# Altium PCB small_matrix_ws2812_LEDs.PcbDoc (part 1 of 2)
Units mm, origin at the board's own origin, x right, y up, seen from the top; angles counter-clockwise.
Board outline 51.05 x 59.31 mm, 2 copper layers (Top Layer, Bottom Layer); 129 components, 63 nets, 389 pads, 120 vias.
Unrouted connection lines stored in the file: 10.
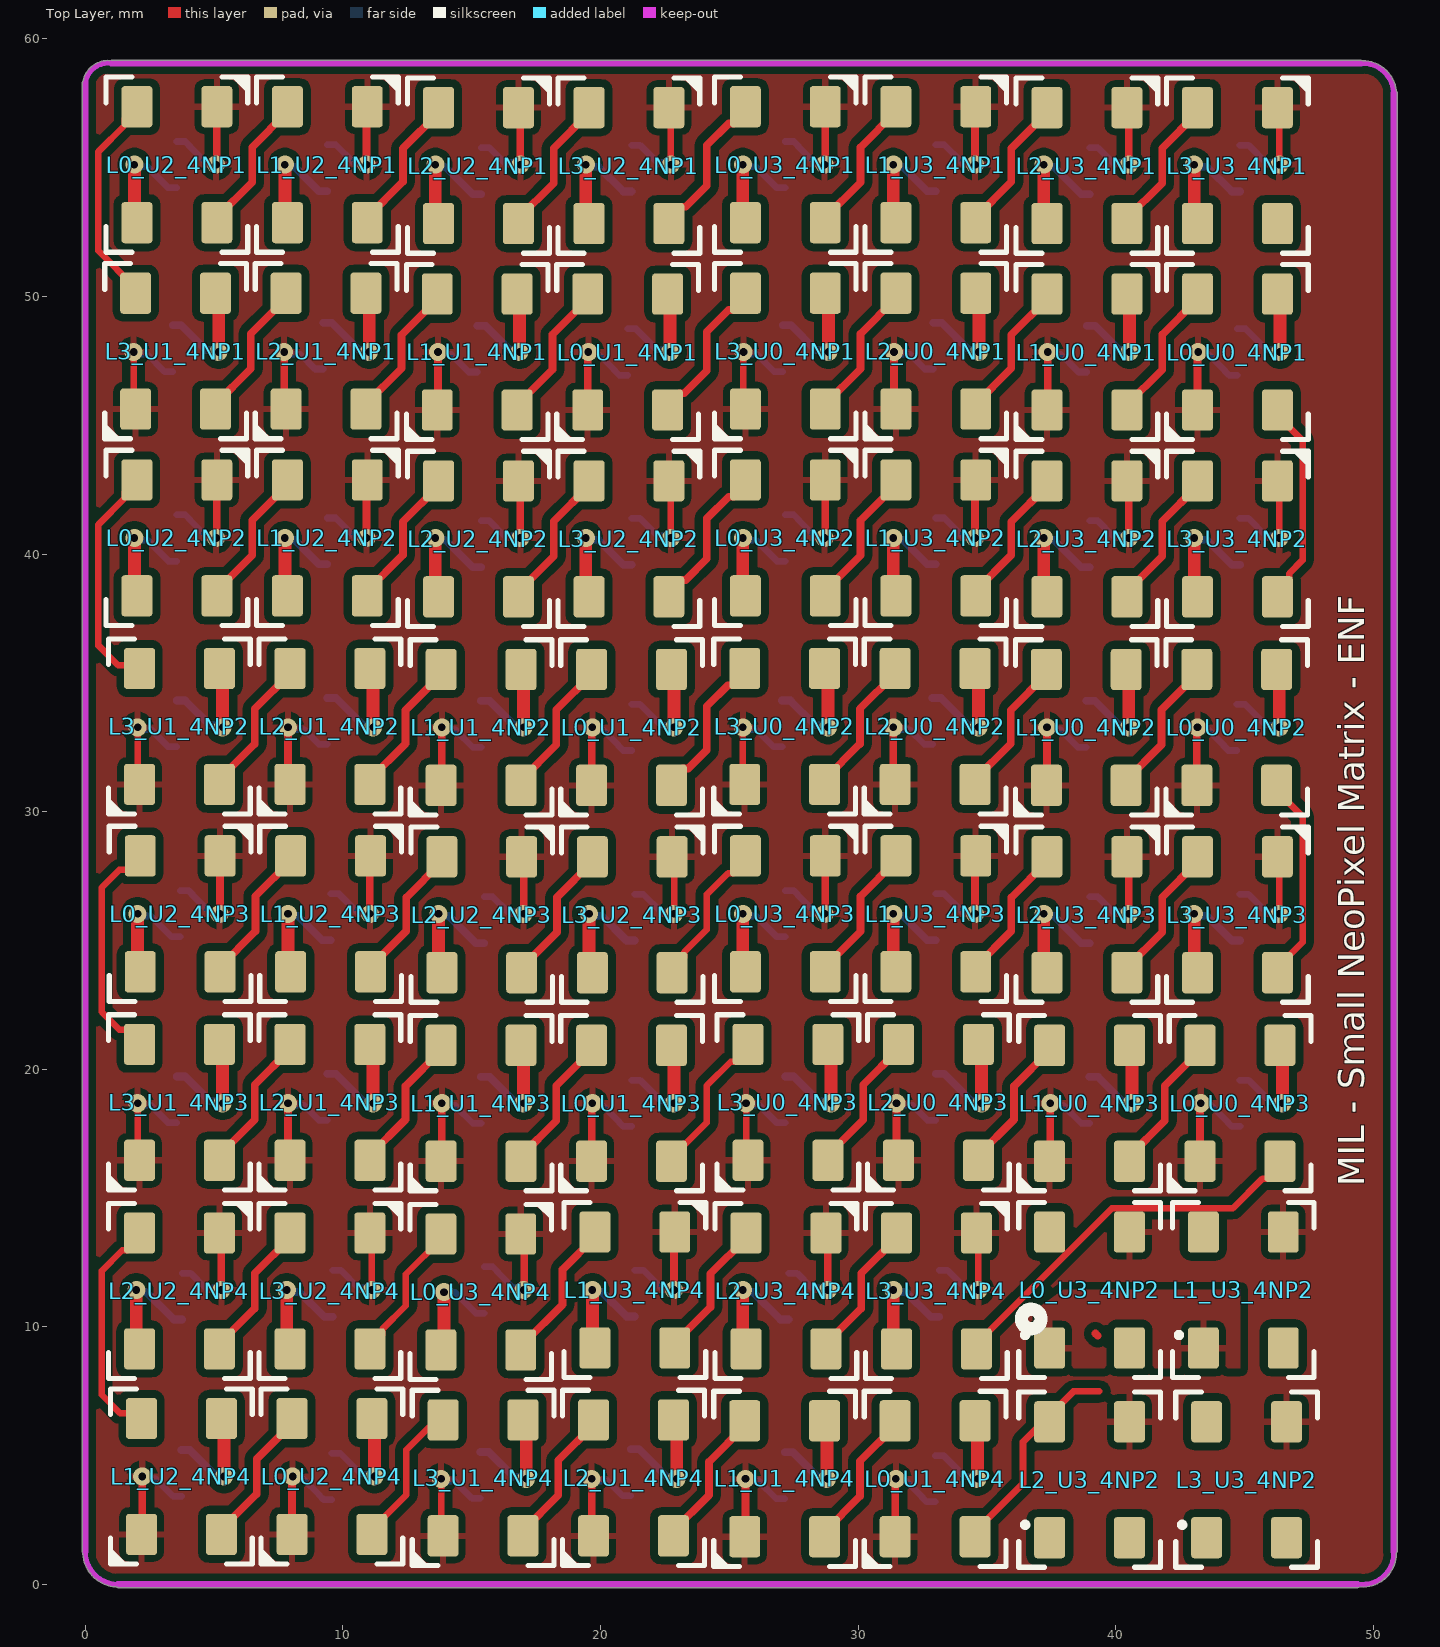
[diagram p0: Top Layer view]
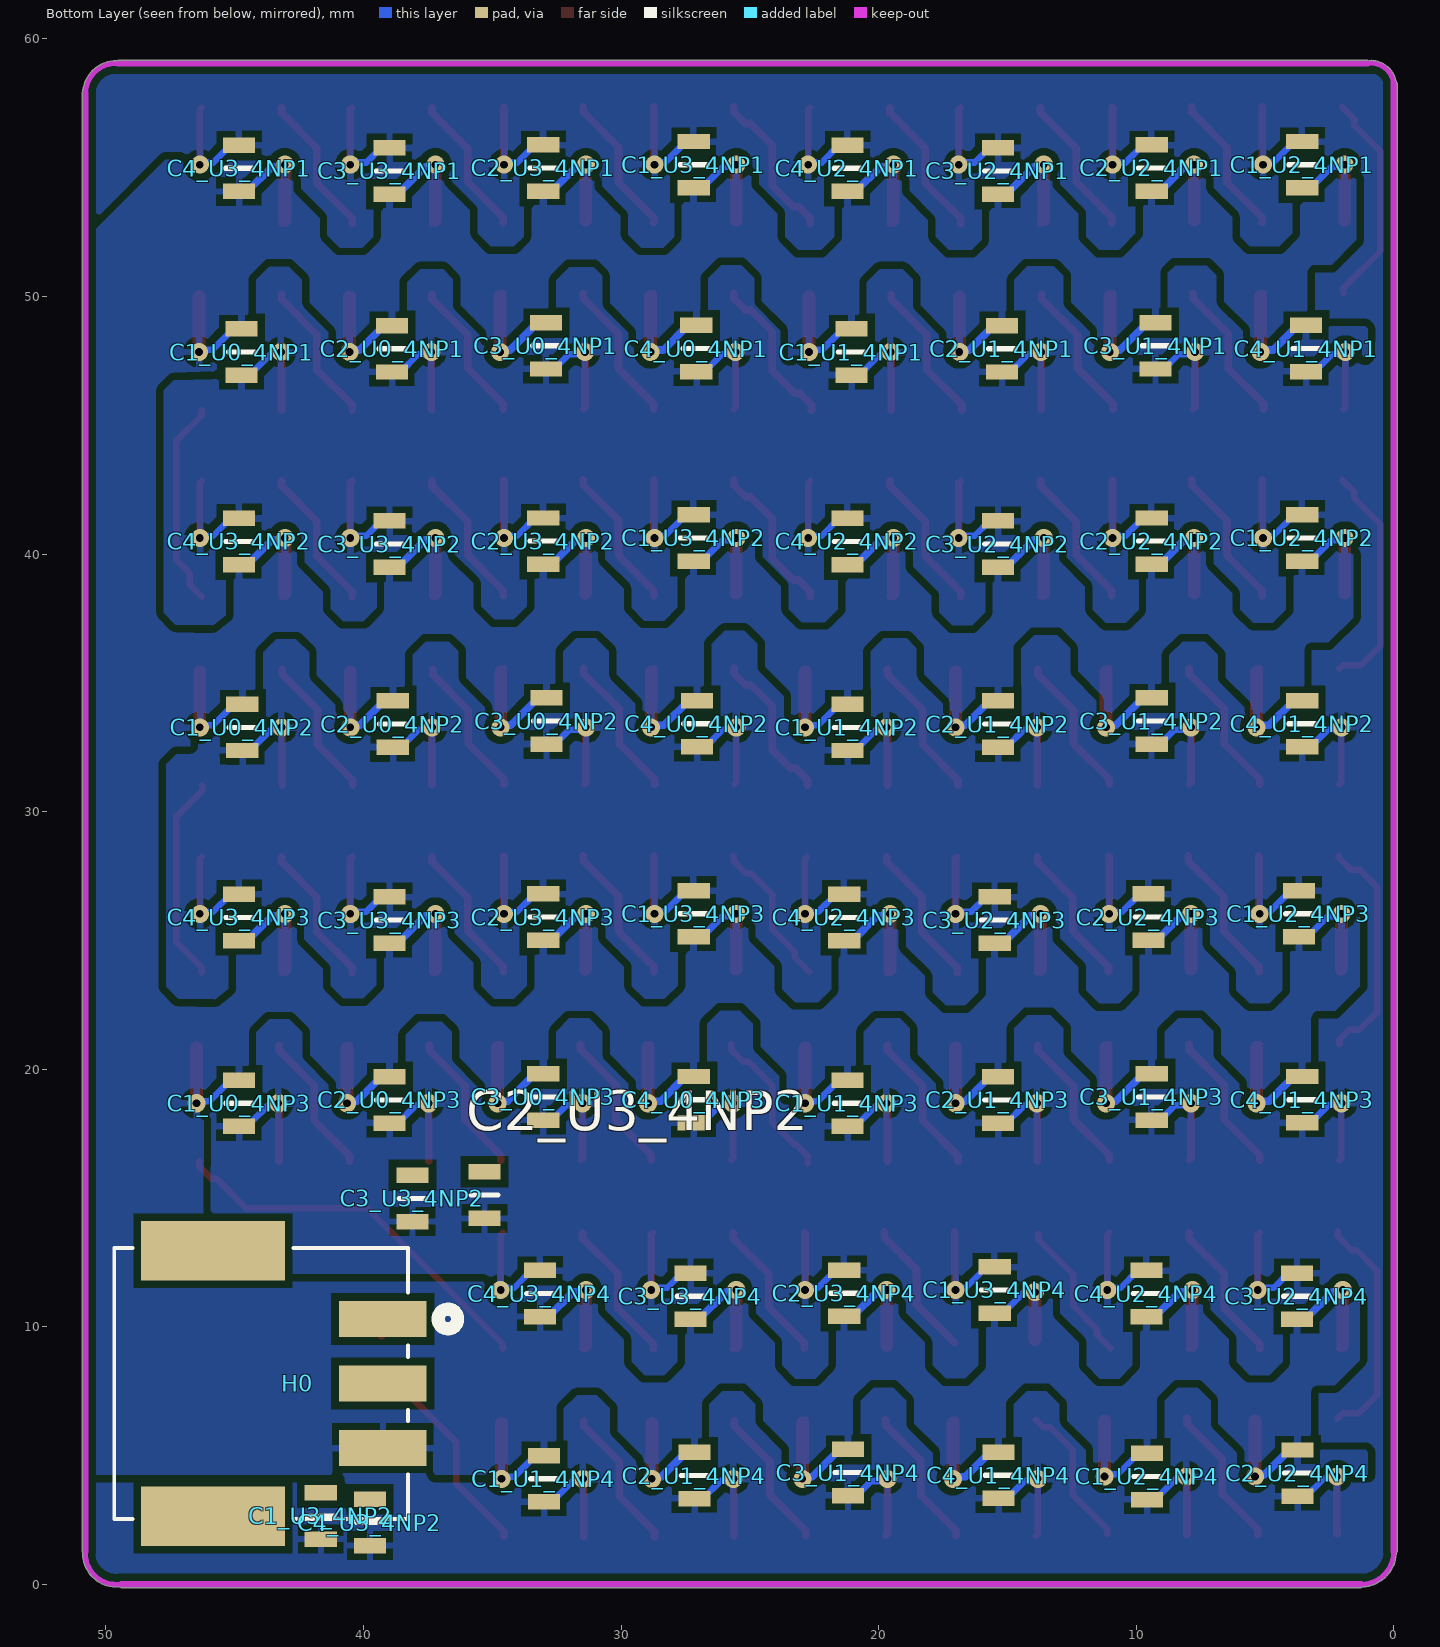
[diagram p1: Bottom Layer view, seen from below]
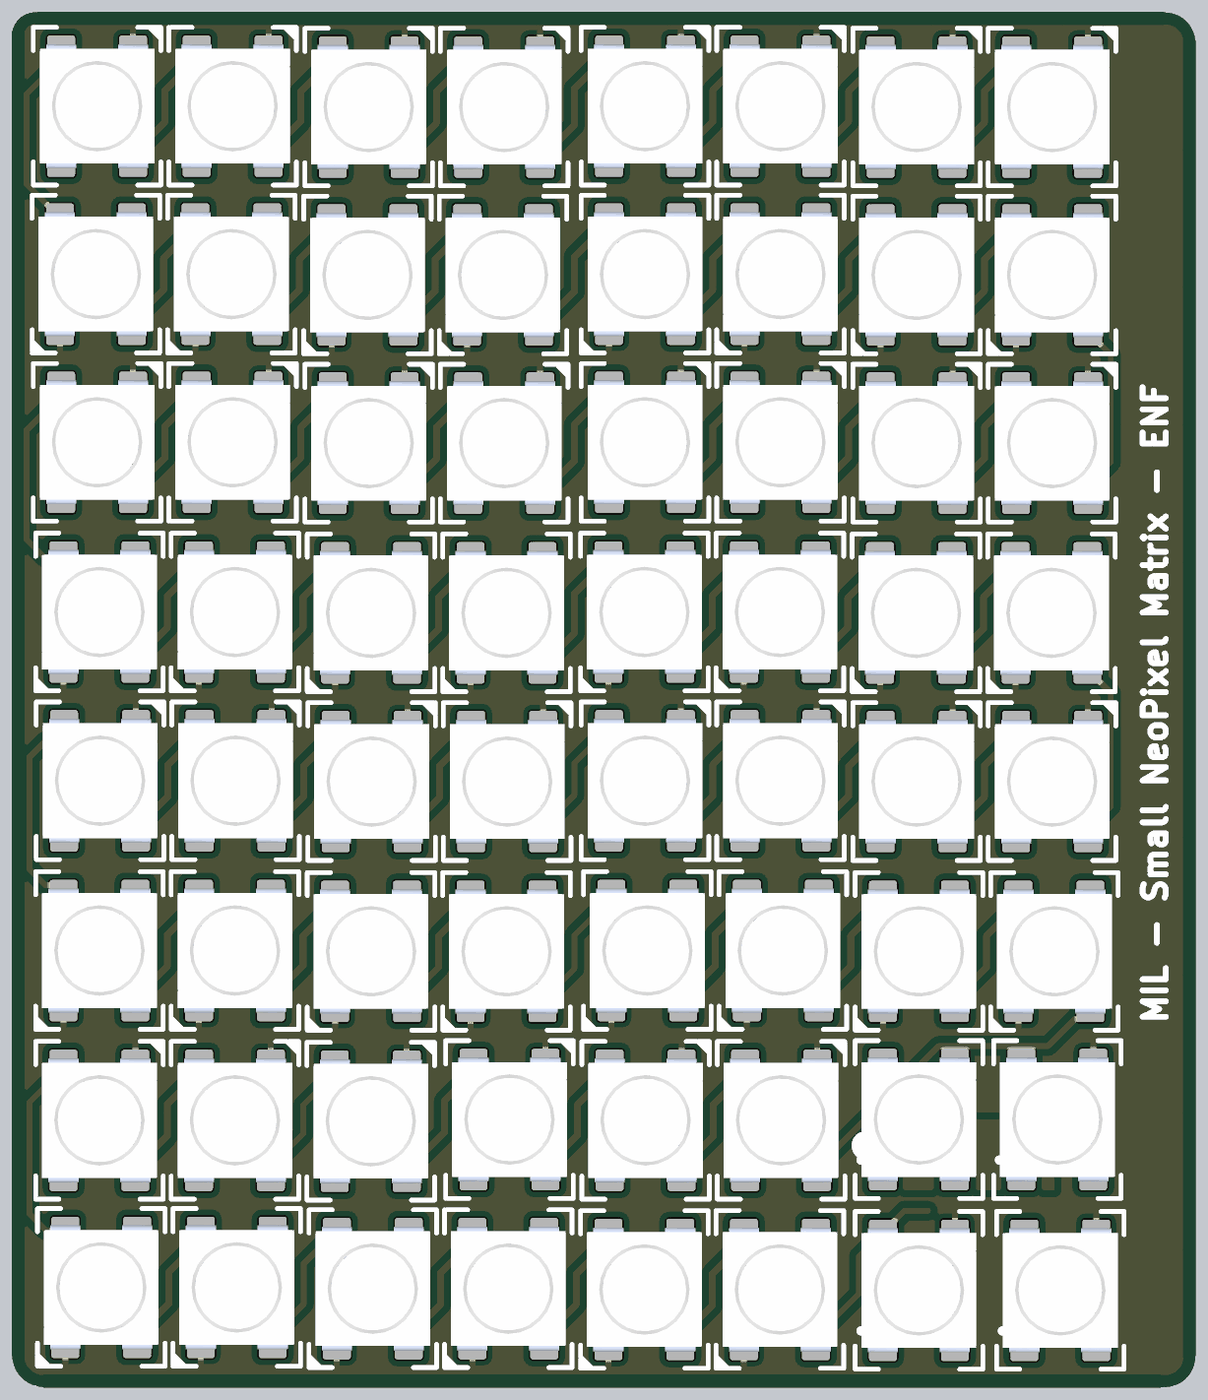
[diagram p3: 3D render of the assembled board from above, using the file's embedded part models]
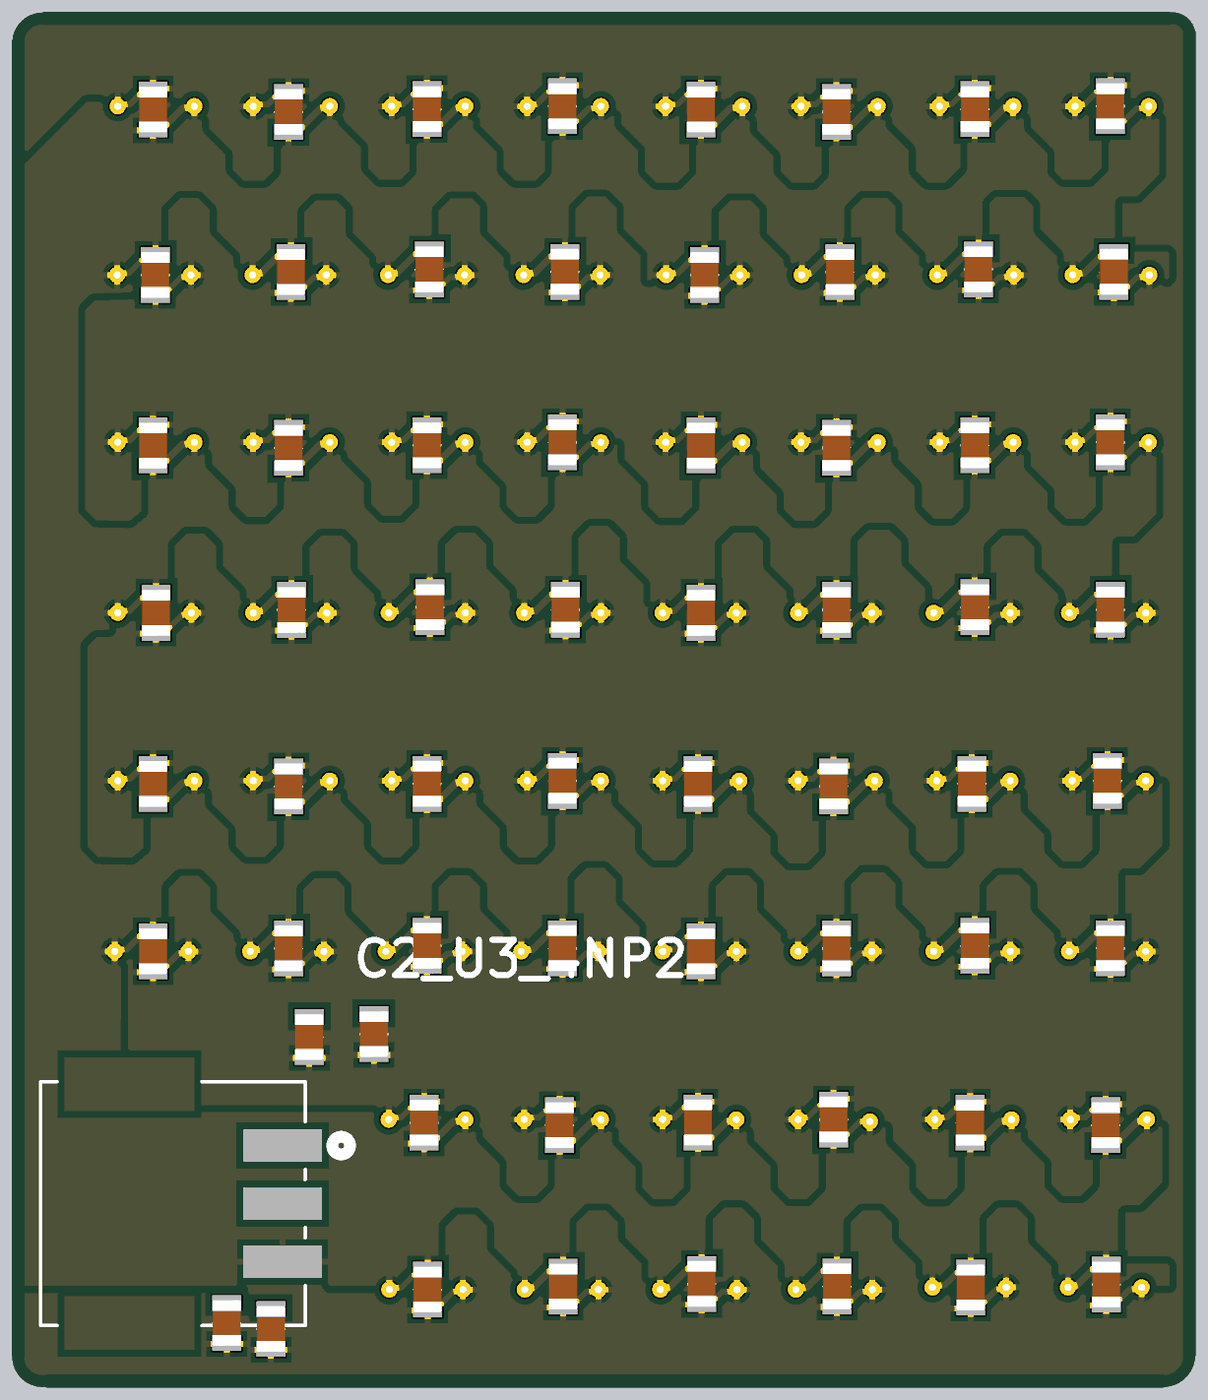
[diagram p4: 3D render of the assembled board from below, using the file's embedded part models]

## Layer stack, top to bottom
Top Solder: solder mask 0.0102, Solder Resist, Dk 3.5
Top Layer: signal copper 0.0356
Dielectric 1: dielectric 0.32, FR-4, Dk 4.8
Bottom Layer: signal copper 0.0356
Bottom Solder: solder mask 0.0102, Solder Resist, Dk 3.5

## Board outline
-0.127,1.27 -0.127,58.293 -0.084,58.388 cw(c0.889,58.166) 0.948,59.163 1.016,59.182 49.53,59.182 49.606,59.157 cw(c49.593,57.848) 50.893,57.999 50.927,57.912 50.927,1.27 50.902,1.194 cw(c49.593,1.206) 49.525,-0.1 49.403,-0.127 1.27,-0.127 1.189,-0.098 cw(c1.27,1.27)

## Design rules (kind name [scope] priority, off if disabled: settings)
BoardOutlineClearance [All] p1: gap=0.2 ignorepadtopadclearanceinfootprint=FALSE
Clearance "inPolygon Clearance" [InPolygon] p1: gap=0.3 ignorepadtopadclearanceinfootprint=TRUE // this rule ensures that every net within a polygon of a different net has a set clearance from the poly
Clearance "Different Diff Pair" [All] p2: gap=0.2 ignorepadtopadclearanceinfootprint=TRUE
Clearance "Same Diff Pair" [All] p3: gap=0.1 ignorepadtopadclearanceinfootprint=TRUE
Clearance "Different Nets" [not InAnyDifferentialPair] p4: gap=0.3 ignorepadtopadclearanceinfootprint=TRUE except(0.1: Arc-SMDPad Arc-THPad Arc-Via Arc-Text Track-SMDPad Track-THPad Track-Via Track-Text SMDPad-Text THPad-Text Via-Text Fill-Text Poly-Text Region-Text Text-Text; 0.12: Arc-Arc Arc-Track Track-Track; 0.15: SMDPad-SMDPad SMDPad-THPad SMDPad-Via THPad-THPad THPad-Via Via-Via; 0.2: Arc-Hole Track-Hole SMDPad-Hole THPad-Hole Via-Hole Fill-Hole Poly-Hole Region-Hole Text-Hole)
Clearance "Same Net" [not InAnyDifferentialPair] p5: gap=0 ignorepadtopadclearanceinfootprint=TRUE except(0.1: THPad-Via; 0.18: Arc-Arc Arc-Track Track-Track)
ComponentClearance [All] p1: gap=0.102 collisioncheckmode=3 verticalgap=0.102 showdistances=TRUE
DiffPairsRouting "Ethernet Routing" [InDifferentialPairClass('Ethernet_Pairs')] p1: maxlimit=0.2 minlimit=0.2 mostfreqgap=0.2 toplayer_minwidth=0.25 toplayer_maxwidth=0.25 toplayer_prefwidth=0.25 bottomlayer_minwidth=0.25 bottomlayer_maxwidth=0.25 bottomlayer_prefwidth=0.25 impedanceprofiledriven=TRUE maxuncoupledlength=12.7
DiffPairsRouting "USB Routing" [InDifferentialPairClass('USB_Pairs')] p2: maxlimit=0.127 minlimit=0.127 mostfreqgap=0.127 toplayer_minwidth=0.23 toplayer_maxwidth=0.23 toplayer_prefwidth=0.23 bottomlayer_minwidth=0.23 bottomlayer_maxwidth=0.23 bottomlayer_prefwidth=0.23 maxuncoupledlength=12.7
DiffPairsRouting "CAN Routing" [InDifferentialPairClass('CAN_Pairs')] p3: maxlimit=0.5 minlimit=0.5 mostfreqgap=0.5 toplayer_minwidth=0.201 toplayer_maxwidth=0.201 toplayer_prefwidth=0.201 bottomlayer_minwidth=0.201 bottomlayer_maxwidth=0.201 bottomlayer_prefwidth=0.201 impedanceprofiledriven=TRUE maxuncoupledlength=12.7
Height [All] p1: minheight=0 maxheight=1816.048 prefheight=12.7
HoleSize [All] p1: absolutevalues=TRUE maxlimit=6.3 minlimit=0.3 maxpercent=80.000 minpercent=20.000
HoleToHoleClearance [All] p1: gap=0.25 allowstackedmicrovias=FALSE
MatchedLengths "XTAL Nets Matched Delays" [InNetClass('XTAL_Nets')] p1: tolerance=25.4 checknetsindiffpair=FALSE checkdiffpairvsdiffpair=TRUE checkxsignals=TRUE checkothers=TRUE usedelayunits=TRUE delaytolerance=10.000000
MatchedLengths "Diff Pair Matched Delays" [InDifferentialPairClass('Ethernet_Pairs') or InDifferentialPairClass('USB_Pairs') or InDifferentialPairClass('CAN_Pairs')] p2: tolerance=5 checknetsindiffpair=TRUE checkdiffpairvsdiffpair=FALSE checkxsignals=FALSE checkothers=FALSE usedelayunits=TRUE delaytolerance=100.000000 phasematching=TRUE phasedelaytolerance=5.000000 phasedistance=12.7
MinimumAnnularRing [All] p1: minimumring=0.2
MinimumSolderMaskSliver [All] p1: minsoldermaskwidth=0
PlaneClearance "Supply Net Clearance" [InNetClass('Supply_Nets')] p1: clearance=0.5
PlaneClearance "All Nets" [All] p2: clearance=0.3
PolygonConnect "Supply Nets" [InNetClass('Supply_Nets')] p1: connectstyle=Relief reliefconductorwidth=0.3 reliefentries=4 polygonreliefangle="90 Angle" conductorbypadedge=TRUE mindistance=0.381 enablemindistance=FALSE airgapwidth=0.254
PolygonConnect General [All] p2: connectstyle=Relief reliefconductorwidth=0.254 reliefentries=4 polygonreliefangle="90 Angle" airgapwidth=0.254
RoutingVias [All] p1: holewidth=0.2 width=0.35 viastyle="Through Hole" minholewidth=0.15 minwidth=0.3 maxholewidth=6.3 maxwidth=6.55
SilkToSilkClearance [All] p1: silktosilkclearance=0
SilkToSolderMaskClearance [All] p1: minsilkscreentomaskgap=0 clearancetoexposedcopper=TRUE
SolderMaskExpansion [All] p1: expansion=0.075 istentingtop=FALSE
SupplyNets "Schematic Supply Nets_8" [InNet('+5')] p1: voltage=0.000
SupplyNets "Schematic Supply Nets_3" [InNet('GND')] p2: voltage=0.000
UnRoutedNet [All] p1: checkbadconnections=TRUE
Width "nRF Width" [InNetClass('nRF Signal')] p1: maxlimit=0.379 minlimit=0.379 preferedwidth=0.379 impedanceprofiledriven=TRUE minimp=50.000000 maximp=50.000000 favimp=50.000000 checkconnectedcopper=TRUE
Width [All] p2: maxlimit=100 minlimit=0.1 preferedwidth=0.2
20 further rules are at their usual default settings.

## Classes and differential pairs
net class L3_U3_4NP1_Nets: +5 GND NetL0_U3_4NP2_4 NetL2_U3_4NP1_2
net class L2_U3_4NP4_Nets: +5 GND NetL1_U3_4NP4_2 NetL2_U3_4NP4_2
net class L2_U3_4NP2_Nets: +5 GND NetL1_U3_4NP2_2 NetL2_U3_4NP2_2
net class L2_U3_4NP1_Nets: +5 GND NetL1_U3_4NP1_2 NetL2_U3_4NP1_2
net class L1_U3_4NP4_Nets: +5 GND NetL0_U3_4NP4_2 NetL1_U3_4NP4_2
net class L0_U3_4NP4_Nets: +5 GND NetL0_U3_4NP4_2 NetL0_U3_4NP4_4
net class L0_U3_4NP2_Nets: +5 GND NetL0_U3_4NP2_2 NetL0_U3_4NP2_4
net class L0_U3_4NP1_Nets: +5 GND NetL0_U3_4NP1_2 NetL0_U3_4NP1_4
component class U3_4NP4: C1_U3_4NP4 C2_U3_4NP4 C3_U3_4NP4 C4_U3_4NP4 L0_U3_4NP4 L1_U3_4NP4 L2_U3_4NP4 L3_U3_4NP4
net class L3_U3_4NP4_Nets: +5 GND NetL0_U0_4NP3_4 NetL2_U3_4NP4_2
net class L3_U3_4NP3_Nets: +5 GND NetL0_U0_4NP2_4 NetL2_U3_4NP3_2
net class L3_U3_4NP2_Nets: +5 GND NetL0_U0_4NP1_4 NetL2_U3_4NP2_2 NetL3_U3_4NP2_2
net class L3_U2_4NP4_Nets: +5 GND NetL0_U3_4NP4_4 NetL2_U2_4NP4_2
net class L3_U2_4NP3_Nets: +5 GND NetL0_U3_4NP3_4 NetL2_U2_4NP3_2
net class L3_U2_4NP2_Nets: +5 GND NetL0_U3_4NP2_4 NetL2_U2_4NP2_2
net class L3_U2_4NP1_Nets: +5 GND NetL0_U3_4NP1_4 NetL2_U2_4NP1_2
net class L3_U1_4NP4_Nets: +5 GND NetL0_U2_4NP4_4 NetL2_U1_4NP4_2
net class L3_U1_4NP3_Nets: +5 GND NetL0_U2_4NP3_4 NetL2_U1_4NP3_2
net class L3_U1_4NP2_Nets: +5 GND NetL0_U2_4NP2_4 NetL2_U1_4NP2_2
net class L3_U1_4NP1_Nets: +5 GND NetL0_U2_4NP1_4 NetL2_U1_4NP1_2
net class L3_U0_4NP3_Nets: +5 GND NetL0_U1_4NP3_4 NetL2_U0_4NP3_2
net class L3_U0_4NP2_Nets: +5 GND NetL0_U1_4NP2_4 NetL2_U0_4NP2_2
net class L3_U0_4NP1_Nets: +5 GND NetL0_U1_4NP1_4 NetL2_U0_4NP1_2
net class L2_U3_4NP3_Nets: +5 GND NetL1_U3_4NP3_2 NetL2_U3_4NP3_2
net class C2_U3_4NP4_Nets: +5 GND
net class C1_U3_4NP4_Nets: +5 GND
net class L2_U2_4NP4_Nets: +5 GND NetL1_U2_4NP4_2 NetL2_U2_4NP4_2
net class L2_U2_4NP3_Nets: +5 GND NetL1_U2_4NP3_2 NetL2_U2_4NP3_2
net class L2_U2_4NP2_Nets: +5 GND NetL1_U2_4NP2_2 NetL2_U2_4NP2_2
net class L2_U2_4NP1_Nets: +5 GND NetL1_U2_4NP1_2 NetL2_U2_4NP1_2
net class L2_U1_4NP4_Nets: +5 GND NetL1_U1_4NP4_2 NetL2_U1_4NP4_2
net class L2_U1_4NP3_Nets: +5 GND NetL1_U1_4NP3_2 NetL2_U1_4NP3_2
net class L2_U1_4NP2_Nets: +5 GND NetL1_U1_4NP2_2 NetL2_U1_4NP2_2
net class L2_U1_4NP1_Nets: +5 GND NetL1_U1_4NP1_2 NetL2_U1_4NP1_2
net class L2_U0_4NP3_Nets: +5 GND NetL1_U0_4NP3_2 NetL2_U0_4NP3_2
net class L2_U0_4NP2_Nets: +5 GND NetL1_U0_4NP2_2 NetL2_U0_4NP2_2
net class L2_U0_4NP1_Nets: +5 GND NetL1_U0_4NP1_2 NetL2_U0_4NP1_2
net class L1_U3_4NP3_Nets: +5 GND NetL0_U3_4NP3_2 NetL1_U3_4NP3_2
net class L1_U3_4NP2_Nets: +5 GND NetL0_U3_4NP2_2 NetL1_U3_4NP2_2
net class L1_U3_4NP1_Nets: +5 GND NetL0_U3_4NP1_2 NetL1_U3_4NP1_2
net class L1_U2_4NP4_Nets: +5 GND NetL0_U2_4NP4_2 NetL1_U2_4NP4_2
net class L1_U2_4NP3_Nets: +5 GND NetL0_U2_4NP3_2 NetL1_U2_4NP3_2
net class L1_U2_4NP2_Nets: +5 GND NetL0_U2_4NP2_2 NetL1_U2_4NP2_2
net class L1_U2_4NP1_Nets: +5 GND NetL0_U2_4NP1_2 NetL1_U2_4NP1_2
net class L1_U1_4NP4_Nets: +5 GND NetL0_U1_4NP4_2 NetL1_U1_4NP4_2
net class L1_U1_4NP3_Nets: +5 GND NetL0_U1_4NP3_2 NetL1_U1_4NP3_2
net class L1_U1_4NP2_Nets: +5 GND NetL0_U1_4NP2_2 NetL1_U1_4NP2_2
net class L1_U1_4NP1_Nets: +5 GND NetL0_U1_4NP1_2 NetL1_U1_4NP1_2
net class L1_U0_4NP3_Nets: +5 GND NetL0_U0_4NP3_2 NetL1_U0_4NP3_2
net class L1_U0_4NP2_Nets: +5 GND NetL0_U0_4NP2_2 NetL1_U0_4NP2_2
net class L1_U0_4NP1_Nets: +5 GND NetL0_U0_4NP1_2 NetL1_U0_4NP1_2
net class L0_U3_4NP3_Nets: +5 GND NetL0_U3_4NP3_2 NetL0_U3_4NP3_4
net class C4_U3_4NP4_Nets: +5 GND
net class C3_U3_4NP4_Nets: +5 GND
net class L0_U2_4NP4_Nets: +5 GND NetL0_U2_4NP4_2 NetL0_U2_4NP4_4
net class L0_U2_4NP3_Nets: +5 GND NetL0_U2_4NP3_2 NetL0_U2_4NP3_4
net class L0_U2_4NP2_Nets: +5 GND NetL0_U2_4NP2_2 NetL0_U2_4NP2_4
net class L0_U2_4NP1_Nets: +5 GND NetL0_U2_4NP1_2 NetL0_U2_4NP1_4
net class L0_U1_4NP4_Nets: +5 DIN_TOP GND NetL0_U1_4NP4_2
net class L0_U1_4NP3_Nets: +5 GND NetL0_U1_4NP3_2 NetL0_U1_4NP3_4
net class L0_U1_4NP2_Nets: +5 GND NetL0_U1_4NP2_2 NetL0_U1_4NP2_4
net class L0_U1_4NP1_Nets: +5 GND NetL0_U1_4NP1_2 NetL0_U1_4NP1_4
net class L0_U0_4NP3_Nets: +5 GND NetL0_U0_4NP3_2 NetL0_U0_4NP3_4
net class L0_U0_4NP2_Nets: +5 GND NetL0_U0_4NP2_2 NetL0_U0_4NP2_4
net class L0_U0_4NP1_Nets: +5 GND NetL0_U0_4NP1_2 NetL0_U0_4NP1_4
net class C4_U3_4NP3_Nets: +5 GND
net class C4_U3_4NP2_Nets: +5 GND
net class C4_U3_4NP1_Nets: +5 GND
net class C4_U2_4NP4_Nets: +5 GND
net class C4_U2_4NP3_Nets: +5 GND
net class C4_U2_4NP2_Nets: +5 GND
net class C4_U2_4NP1_Nets: +5 GND
net class C4_U1_4NP4_Nets: +5 GND
net class C4_U1_4NP3_Nets: +5 GND
net class C4_U1_4NP2_Nets: +5 GND
net class C4_U1_4NP1_Nets: +5 GND
net class C4_U0_4NP3_Nets: +5 GND
net class C4_U0_4NP2_Nets: +5 GND
net class C4_U0_4NP1_Nets: +5 GND
net class C3_U3_4NP3_Nets: +5 GND
net class C3_U3_4NP2_Nets: +5 GND
net class C3_U3_4NP1_Nets: +5 GND
net class C3_U2_4NP4_Nets: +5 GND
net class C3_U2_4NP2_Nets: +5 GND
net class C3_U2_4NP1_Nets: +5 GND
net class C3_U1_4NP4_Nets: +5 GND
net class C3_U1_4NP3_Nets: +5 GND
net class C3_U1_4NP2_Nets: +5 GND
net class C3_U1_4NP1_Nets: +5 GND
net class C3_U0_4NP3_Nets: +5 GND
net class C3_U0_4NP2_Nets: +5 GND
net class C3_U0_4NP1_Nets: +5 GND
net class C2_U3_4NP3_Nets: +5 GND
net class C2_U3_4NP2_Nets: +5 GND
net class C2_U3_4NP1_Nets: +5 GND
net class C2_U2_4NP4_Nets: +5 GND
net class C2_U2_4NP3_Nets: +5 GND
net class C2_U2_4NP2_Nets: +5 GND
net class C2_U2_4NP1_Nets: +5 GND
net class C2_U1_4NP4_Nets: +5 GND
net class C2_U1_4NP3_Nets: +5 GND
net class C2_U1_4NP2_Nets: +5 GND
net class C2_U1_4NP1_Nets: +5 GND
net class C2_U0_4NP3_Nets: +5 GND
net class C2_U0_4NP2_Nets: +5 GND
net class C2_U0_4NP1_Nets: +5 GND
net class C1_U3_4NP3_Nets: +5 GND
net class C1_U3_4NP2_Nets: +5 GND
net class C1_U3_4NP1_Nets: +5 GND
net class C1_U2_4NP4_Nets: +5 GND
net class C1_U2_4NP3_Nets: +5 GND
net class C1_U2_4NP2_Nets: +5 GND
net class C1_U2_4NP1_Nets: +5 GND
net class C1_U1_4NP4_Nets: +5 GND
net class C1_U1_4NP3_Nets: +5 GND
net class C1_U1_4NP2_Nets: +5 GND
net class C1_U1_4NP1_Nets: +5 GND
net class C1_U0_4NP3_Nets: +5 GND
net class C1_U0_4NP2_Nets: +5 GND
net class C1_U0_4NP1_Nets: +5 GND
component class U3_4NP3: C1_U3_4NP3 C2_U3_4NP3 C3_U3_4NP3 C4_U3_4NP3 L0_U3_4NP3 L1_U3_4NP3 L2_U3_4NP3 L3_U3_4NP3
component class U3_4NP2: C1_U3_4NP2 C2_U3_4NP2 C3_U3_4NP2 C4_U3_4NP2 L0_U3_4NP2 L1_U3_4NP2 L2_U3_4NP2 L3_U3_4NP2
component class U3_4NP1: C1_U3_4NP1 C2_U3_4NP1 C3_U3_4NP1 C4_U3_4NP1 L0_U3_4NP1 L1_U3_4NP1 L2_U3_4NP1 L3_U3_4NP1
component class U2_4NP4: C1_U2_4NP4 C2_U2_4NP4 C3_U2_4NP4 C4_U2_4NP4 L0_U2_4NP4 L1_U2_4NP4 L2_U2_4NP4 L3_U2_4NP4
component class U2_4NP3: C1_U2_4NP3 C2_U2_4NP3 C3_U2_4NP3 C4_U2_4NP3 L0_U2_4NP3 L1_U2_4NP3 L2_U2_4NP3 L3_U2_4NP3
component class U2_4NP2: C1_U2_4NP2 C2_U2_4NP2 C3_U2_4NP2 C4_U2_4NP2 L0_U2_4NP2 L1_U2_4NP2 L2_U2_4NP2 L3_U2_4NP2
component class U2_4NP1: C1_U2_4NP1 C2_U2_4NP1 C3_U2_4NP1 C4_U2_4NP1 L0_U2_4NP1 L1_U2_4NP1 L2_U2_4NP1 L3_U2_4NP1
component class U1_4NP4: C1_U1_4NP4 C2_U1_4NP4 C3_U1_4NP4 C4_U1_4NP4 L0_U1_4NP4 L1_U1_4NP4 L2_U1_4NP4 L3_U1_4NP4
component class U1_4NP3: C1_U1_4NP3 C2_U1_4NP3 C3_U1_4NP3 C4_U1_4NP3 L0_U1_4NP3 L1_U1_4NP3 L2_U1_4NP3 L3_U1_4NP3
component class U1_4NP2: C1_U1_4NP2 C2_U1_4NP2 C3_U1_4NP2 C4_U1_4NP2 L0_U1_4NP2 L1_U1_4NP2 L2_U1_4NP2 L3_U1_4NP2
component class U1_4NP1: C1_U1_4NP1 C2_U1_4NP1 C3_U1_4NP1 C4_U1_4NP1 L0_U1_4NP1 L1_U1_4NP1 L2_U1_4NP1 L3_U1_4NP1
component class U0_4NP3: C1_U0_4NP3 C2_U0_4NP3 C3_U0_4NP3 C4_U0_4NP3 L0_U0_4NP3 L1_U0_4NP3 L2_U0_4NP3 L3_U0_4NP3
component class U0_4NP2: C1_U0_4NP2 C2_U0_4NP2 C3_U0_4NP2 C4_U0_4NP2 L0_U0_4NP2 L1_U0_4NP2 L2_U0_4NP2 L3_U0_4NP2
component class U0_4NP1: C1_U0_4NP1 C2_U0_4NP1 C3_U0_4NP1 C4_U0_4NP1 L0_U0_4NP1 L1_U0_4NP1 L2_U0_4NP1 L3_U0_4NP1
net class H0_Nets: +5 DIN_TOP GND
net class C3_U2_4NP3_Nets: +5 GND
channel class four_neopixels: U0_4NP1 U0_4NP2 U0_4NP3 U1_4NP1 U1_4NP2 U1_4NP3 U1_4NP4 U2_4NP1 U2_4NP2 U2_4NP3 U2_4NP4 U3_4NP1 U3_4NP2 U3_4NP3 U3_4NP4
component class small_matrix_ws2812_LEDs: H0

## Components (designator, comment, footprint, x,y, rotation, side; value= is the part's Value field where it differs from the comment)
C1_U0_4NP1 "[Cap] 0805 0.1uF 10% 50V" "[Cap] SMD 0805" 44.73,47.843 r90 bottom (schematic designator C1)
C1_U0_4NP2 "[Cap] 0805 0.1uF 10% 50V" "[Cap] SMD 0805" 44.704,33.274 r90 bottom (schematic designator C1)
C1_U0_4NP3 "[Cap] 0805 0.1uF 10% 50V" "[Cap] SMD 0805" 44.831,18.68 r90 bottom (schematic designator C1)
C1_U1_4NP1 "[Cap] 0805 0.1uF 10% 50V" "[Cap] SMD 0805" 21.056,47.843 r90 bottom (schematic designator C1)
C1_U1_4NP2 "[Cap] 0805 0.1uF 10% 50V" "[Cap] SMD 0805" 21.209,33.274 r90 bottom (schematic designator C1)
C1_U1_4NP3 "[Cap] 0805 0.1uF 10% 50V" "[Cap] SMD 0805" 21.209,18.68 r90 bottom (schematic designator C1)
C1_U1_4NP4 "[Cap] 0805 0.1uF 10% 50V" "[Cap] SMD 0805" 32.994,4.1 r90 bottom (schematic designator C1)
C1_U2_4NP1 "[Cap] 0805 0.1uF 10% 50V" "[Cap] SMD 0805" 3.556,55.118 r270 bottom (schematic designator C1)
C1_U2_4NP2 "[Cap] 0805 0.1uF 10% 50V" "[Cap] SMD 0805" 3.556,40.629 r270 bottom (schematic designator C1)
C1_U2_4NP3 "[Cap] 0805 0.1uF 10% 50V" "[Cap] SMD 0805" 3.683,26.035 r270 bottom (schematic designator C1)
C1_U2_4NP4 "[Cap] 0805 0.1uF 10% 50V" "[Cap] SMD 0805" 9.577,4.191 r90 bottom (schematic designator C1)
C1_U3_4NP1 "[Cap] 0805 0.1uF 10% 50V" "[Cap] SMD 0805" 27.178,55.118 r270 bottom (schematic designator C1)
C1_U3_4NP2 "[Cap] 0805 0.1uF 10% 50V" "[Cap] SMD 0805" 41.656,2.656 r90 bottom (schematic designator C1)
C1_U3_4NP2 "[Cap] 0805 0.1uF 10% 50V" "[Cap] SMD 0805" 27.178,40.629 r270 bottom (schematic designator C1)
C1_U3_4NP3 "[Cap] 0805 0.1uF 10% 50V" "[Cap] SMD 0805" 27.178,26.035 r270 bottom (schematic designator C1)
C1_U3_4NP4 "[Cap] 0805 0.1uF 10% 50V" "[Cap] SMD 0805" 15.494,11.43 r270 bottom (schematic designator C1)
C2_U0_4NP1 "[Cap] 0805 0.1uF 10% 50V" "[Cap] SMD 0805" 38.888,47.97 r90 bottom (schematic designator C2)
C2_U0_4NP2 "[Cap] 0805 0.1uF 10% 50V" "[Cap] SMD 0805" 38.862,33.401 r90 bottom (schematic designator C2)
C2_U0_4NP3 "[Cap] 0805 0.1uF 10% 50V" "[Cap] SMD 0805" 38.989,18.807 r90 bottom (schematic designator C2)
C2_U1_4NP1 "[Cap] 0805 0.1uF 10% 50V" "[Cap] SMD 0805" 15.214,47.97 r90 bottom (schematic designator C2)
C2_U1_4NP2 "[Cap] 0805 0.1uF 10% 50V" "[Cap] SMD 0805" 15.367,33.401 r90 bottom (schematic designator C2)
C2_U1_4NP3 "[Cap] 0805 0.1uF 10% 50V" "[Cap] SMD 0805" 15.367,18.807 r90 bottom (schematic designator C2)
C2_U1_4NP4 "[Cap] 0805 0.1uF 10% 50V" "[Cap] SMD 0805" 27.152,4.227 r90 bottom (schematic designator C2)
C2_U2_4NP1 "[Cap] 0805 0.1uF 10% 50V" "[Cap] SMD 0805" 9.398,54.991 r270 bottom (schematic designator C2)
C2_U2_4NP2 "[Cap] 0805 0.1uF 10% 50V" "[Cap] SMD 0805" 9.398,40.502 r270 bottom (schematic designator C2)
C2_U2_4NP3 "[Cap] 0805 0.1uF 10% 50V" "[Cap] SMD 0805" 9.525,25.908 r270 bottom (schematic designator C2)
C2_U2_4NP4 "[Cap] 0805 0.1uF 10% 50V" "[Cap] SMD 0805" 3.735,4.318 r90 bottom (schematic designator C2)
C2_U3_4NP1 "[Cap] 0805 0.1uF 10% 50V" "[Cap] SMD 0805" 33.02,54.991 r270 bottom (schematic designator C2)
C2_U3_4NP2 "[Cap] 0805 0.1uF 10% 50V" "[Cap] SMD 0805" 35.306,15.113 r90 bottom (schematic designator C2)
C2_U3_4NP2 "[Cap] 0805 0.1uF 10% 50V" "[Cap] SMD 0805" 33.02,40.502 r270 bottom (schematic designator C2)
C2_U3_4NP3 "[Cap] 0805 0.1uF 10% 50V" "[Cap] SMD 0805" 33.02,25.908 r270 bottom (schematic designator C2)
C2_U3_4NP4 "[Cap] 0805 0.1uF 10% 50V" "[Cap] SMD 0805" 21.336,11.303 r270 bottom (schematic designator C2)
C3_U0_4NP1 "[Cap] 0805 0.1uF 10% 50V" "[Cap] SMD 0805" 32.919,48.086 r90 bottom (schematic designator C3)
C3_U0_4NP2 "[Cap] 0805 0.1uF 10% 50V" "[Cap] SMD 0805" 32.893,33.517 r90 bottom (schematic designator C3)
C3_U0_4NP3 "[Cap] 0805 0.1uF 10% 50V" "[Cap] SMD 0805" 33.02,18.923 r90 bottom (schematic designator C3)
C3_U1_4NP1 "[Cap] 0805 0.1uF 10% 50V" "[Cap] SMD 0805" 9.245,48.086 r90 bottom (schematic designator C3)
C3_U1_4NP2 "[Cap] 0805 0.1uF 10% 50V" "[Cap] SMD 0805" 9.398,33.517 r90 bottom (schematic designator C3)
C3_U1_4NP3 "[Cap] 0805 0.1uF 10% 50V" "[Cap] SMD 0805" 9.398,18.923 r90 bottom (schematic designator C3)
C3_U1_4NP4 "[Cap] 0805 0.1uF 10% 50V" "[Cap] SMD 0805" 21.183,4.343 r90 bottom (schematic designator C3)
C3_U2_4NP1 "[Cap] 0805 0.1uF 10% 50V" "[Cap] SMD 0805" 15.367,54.875 r270 bottom (schematic designator C3)
C3_U2_4NP2 "[Cap] 0805 0.1uF 10% 50V" "[Cap] SMD 0805" 15.367,40.386 r270 bottom (schematic designator C3)
C3_U2_4NP3 "[Cap] 0805 0.1uF 10% 50V" "[Cap] SMD 0805" 15.494,25.792 r270 bottom (schematic designator C3)
C3_U2_4NP4 "[Cap] 0805 0.1uF 10% 50V" "[Cap] SMD 0805" 3.758,11.187 r270 bottom (schematic designator C3)
C3_U3_4NP1 "[Cap] 0805 0.1uF 10% 50V" "[Cap] SMD 0805" 38.989,54.875 r270 bottom (schematic designator C3)
C3_U3_4NP2 "[Cap] 0805 0.1uF 10% 50V" "[Cap] SMD 0805" 38.1,14.986 r90 bottom (schematic designator C3)
C3_U3_4NP2 "[Cap] 0805 0.1uF 10% 50V" "[Cap] SMD 0805" 38.989,40.386 r270 bottom (schematic designator C3)
C3_U3_4NP3 "[Cap] 0805 0.1uF 10% 50V" "[Cap] SMD 0805" 38.989,25.792 r270 bottom (schematic designator C3)
C3_U3_4NP4 "[Cap] 0805 0.1uF 10% 50V" "[Cap] SMD 0805" 27.305,11.187 r270 bottom (schematic designator C3)
C4_U0_4NP1 "[Cap] 0805 0.1uF 10% 50V" "[Cap] SMD 0805" 27.077,47.981 r90 bottom (schematic designator C4)
C4_U0_4NP2 "[Cap] 0805 0.1uF 10% 50V" "[Cap] SMD 0805" 27.051,33.412 r90 bottom (schematic designator C4)
C4_U0_4NP3 "[Cap] 0805 0.1uF 10% 50V" "[Cap] SMD 0805" 27.178,18.818 r90 bottom (schematic designator C4)
C4_U1_4NP1 "[Cap] 0805 0.1uF 10% 50V" "[Cap] SMD 0805" 3.403,47.981 r90 bottom (schematic designator C4)
C4_U1_4NP2 "[Cap] 0805 0.1uF 10% 50V" "[Cap] SMD 0805" 3.556,33.412 r90 bottom (schematic designator C4)
C4_U1_4NP3 "[Cap] 0805 0.1uF 10% 50V" "[Cap] SMD 0805" 3.556,18.818 r90 bottom (schematic designator C4)
C4_U1_4NP4 "[Cap] 0805 0.1uF 10% 50V" "[Cap] SMD 0805" 15.341,4.238 r90 bottom (schematic designator C4)
C4_U2_4NP1 "[Cap] 0805 0.1uF 10% 50V" "[Cap] SMD 0805" 21.209,54.98 r270 bottom (schematic designator C4)
C4_U2_4NP2 "[Cap] 0805 0.1uF 10% 50V" "[Cap] SMD 0805" 21.209,40.491 r270 bottom (schematic designator C4)
C4_U2_4NP3 "[Cap] 0805 0.1uF 10% 50V" "[Cap] SMD 0805" 21.336,25.897 r270 bottom (schematic designator C4)
C4_U2_4NP4 "[Cap] 0805 0.1uF 10% 50V" "[Cap] SMD 0805" 9.6,11.292 r270 bottom (schematic designator C4)
C4_U3_4NP1 "[Cap] 0805 0.1uF 10% 50V" "[Cap] SMD 0805" 44.831,54.98 r270 bottom (schematic designator C4)
C4_U3_4NP2 "[Cap] 0805 0.1uF 10% 50V" "[Cap] SMD 0805" 39.751,2.402 r90 bottom (schematic designator C4)
C4_U3_4NP2 "[Cap] 0805 0.1uF 10% 50V" "[Cap] SMD 0805" 44.831,40.491 r270 bottom (schematic designator C4)
C4_U3_4NP3 "[Cap] 0805 0.1uF 10% 50V" "[Cap] SMD 0805" 44.831,25.897 r270 bottom (schematic designator C4)
C4_U3_4NP4 "[Cap] 0805 0.1uF 10% 50V" "[Cap] SMD 0805" 33.147,11.292 r270 bottom (schematic designator C4)
H0 "1x3 Male" "[No Series] Shrouded 1x3" 43.972,7.804 r270 bottom
L0_U0_4NP1 "[Neopixel] Single LED" "[NEOPIXEL] SINGLE LED" 44.73,47.843 r270 top (schematic designator L0)
L0_U0_4NP2 "[Neopixel] Single LED" "[NEOPIXEL] SINGLE LED" 44.704,33.274 r270 top (schematic designator L0)
L0_U0_4NP3 "[Neopixel] Single LED" "[NEOPIXEL] SINGLE LED" 44.831,18.68 r270 top (schematic designator L0)
L0_U1_4NP1 "[Neopixel] Single LED" "[NEOPIXEL] SINGLE LED" 21.056,47.843 r270 top (schematic designator L0)
L0_U1_4NP2 "[Neopixel] Single LED" "[NEOPIXEL] SINGLE LED" 21.209,33.274 r270 top (schematic designator L0)
L0_U1_4NP3 "[Neopixel] Single LED" "[NEOPIXEL] SINGLE LED" 21.209,18.68 r270 top (schematic designator L0)
L0_U1_4NP4 "[Neopixel] Single LED" "[NEOPIXEL] SINGLE LED" 32.994,4.1 r270 top (schematic designator L0)
L0_U2_4NP1 "[Neopixel] Single LED" "[NEOPIXEL] SINGLE LED" 3.556,55.118 r90 top (schematic designator L0)
L0_U2_4NP2 "[Neopixel] Single LED" "[NEOPIXEL] SINGLE LED" 3.556,40.629 r90 top (schematic designator L0)
L0_U2_4NP3 "[Neopixel] Single LED" "[NEOPIXEL] SINGLE LED" 3.683,26.035 r90 top (schematic designator L0)
L0_U2_4NP4 "[Neopixel] Single LED" "[NEOPIXEL] SINGLE LED" 9.577,4.191 r270 top (schematic designator L0)
L0_U3_4NP1 "[Neopixel] Single LED" "[NEOPIXEL] SINGLE LED" 27.178,55.118 r90 top (schematic designator L0)
L0_U3_4NP2 "[Neopixel] Single LED" "[Neopixel] Single LED" 38.989,11.43 r90 top (schematic designator L0)
L0_U3_4NP2 "[Neopixel] Single LED" "[NEOPIXEL] SINGLE LED" 27.178,40.629 r90 top (schematic designator L0)
L0_U3_4NP3 "[Neopixel] Single LED" "[NEOPIXEL] SINGLE LED" 27.178,26.035 r90 top (schematic designator L0)
L0_U3_4NP4 "[Neopixel] Single LED" "[NEOPIXEL] SINGLE LED" 15.356,11.354 r90 top (schematic designator L0)
L1_U0_4NP1 "[Neopixel] Single LED" "[NEOPIXEL] SINGLE LED" 38.888,47.843 r270 top (schematic designator L1)
L1_U0_4NP2 "[Neopixel] Single LED" "[NEOPIXEL] SINGLE LED" 38.862,33.274 r270 top (schematic designator L1)
L1_U0_4NP3 "[Neopixel] Single LED" "[NEOPIXEL] SINGLE LED" 38.989,18.68 r270 top (schematic designator L1)
L1_U1_4NP1 "[Neopixel] Single LED" "[NEOPIXEL] SINGLE LED" 15.214,47.843 r270 top (schematic designator L1)
L1_U1_4NP2 "[Neopixel] Single LED" "[NEOPIXEL] SINGLE LED" 15.367,33.274 r270 top (schematic designator L1)
L1_U1_4NP3 "[Neopixel] Single LED" "[NEOPIXEL] SINGLE LED" 15.367,18.68 r270 top (schematic designator L1)
L1_U1_4NP4 "[Neopixel] Single LED" "[NEOPIXEL] SINGLE LED" 27.152,4.1 r270 top (schematic designator L1)
L1_U2_4NP1 "[Neopixel] Single LED" "[NEOPIXEL] SINGLE LED" 9.398,55.118 r90 top (schematic designator L1)
L1_U2_4NP2 "[Neopixel] Single LED" "[NEOPIXEL] SINGLE LED" 9.398,40.629 r90 top (schematic designator L1)
L1_U2_4NP3 "[Neopixel] Single LED" "[NEOPIXEL] SINGLE LED" 9.525,26.035 r90 top (schematic designator L1)
L1_U2_4NP4 "[Neopixel] Single LED" "[NEOPIXEL] SINGLE LED" 3.735,4.191 r270 top (schematic designator L1)
L1_U3_4NP1 "[Neopixel] Single LED" "[NEOPIXEL] SINGLE LED" 33.02,55.118 r90 top (schematic designator L1)
L1_U3_4NP2 "[Neopixel] Single LED" "[Neopixel] Single LED" 44.958,11.43 r90 top (schematic designator L1)
L1_U3_4NP2 "[Neopixel] Single LED" "[NEOPIXEL] SINGLE LED" 33.02,40.629 r90 top (schematic designator L1)
L1_U3_4NP3 "[Neopixel] Single LED" "[NEOPIXEL] SINGLE LED" 33.02,26.035 r90 top (schematic designator L1)
L1_U3_4NP4 "[Neopixel] Single LED" "[NEOPIXEL] SINGLE LED" 21.336,11.43 r90 top (schematic designator L1)
L2_U0_4NP1 "[Neopixel] Single LED" "[NEOPIXEL] SINGLE LED" 33.02,47.879 r270 top (schematic designator L2)
L2_U0_4NP2 "[Neopixel] Single LED" "[NEOPIXEL] SINGLE LED" 32.994,33.31 r270 top (schematic designator L2)
L2_U0_4NP3 "[Neopixel] Single LED" "[NEOPIXEL] SINGLE LED" 33.121,18.716 r270 top (schematic designator L2)
L2_U1_4NP1 "[Neopixel] Single LED" "[NEOPIXEL] SINGLE LED" 9.346,47.879 r270 top (schematic designator L2)
L2_U1_4NP2 "[Neopixel] Single LED" "[NEOPIXEL] SINGLE LED" 9.499,33.31 r270 top (schematic designator L2)
L2_U1_4NP3 "[Neopixel] Single LED" "[NEOPIXEL] SINGLE LED" 9.499,18.716 r270 top (schematic designator L2)
L2_U1_4NP4 "[Neopixel] Single LED" "[NEOPIXEL] SINGLE LED" 21.284,4.136 r270 top (schematic designator L2)
L2_U2_4NP1 "[Neopixel] Single LED" "[NEOPIXEL] SINGLE LED" 15.266,55.082 r90 top (schematic designator L2)
L2_U2_4NP2 "[Neopixel] Single LED" "[NEOPIXEL] SINGLE LED" 15.266,40.593 r90 top (schematic designator L2)
L2_U2_4NP3 "[Neopixel] Single LED" "[NEOPIXEL] SINGLE LED" 15.393,25.999 r90 top (schematic designator L2)
L2_U2_4NP4 "[Neopixel] Single LED" "[NEOPIXEL] SINGLE LED" 3.657,11.394 r90 top (schematic designator L2)
L2_U3_4NP1 "[Neopixel] Single LED" "[NEOPIXEL] SINGLE LED" 38.888,55.082 r90 top (schematic designator L2)
L2_U3_4NP2 "[Neopixel] Single LED" "[Neopixel] Single LED" 38.989,4.064 r90 top (schematic designator L2)
L2_U3_4NP2 "[Neopixel] Single LED" "[NEOPIXEL] SINGLE LED" 38.888,40.593 r90 top (schematic designator L2)
L2_U3_4NP3 "[Neopixel] Single LED" "[NEOPIXEL] SINGLE LED" 38.888,25.999 r90 top (schematic designator L2)
L2_U3_4NP4 "[Neopixel] Single LED" "[NEOPIXEL] SINGLE LED" 27.204,11.394 r90 top (schematic designator L2)
L3_U0_4NP1 "[Neopixel] Single LED" "[NEOPIXEL] SINGLE LED" 27.178,47.879 r270 top (schematic designator L3)
L3_U0_4NP2 "[Neopixel] Single LED" "[NEOPIXEL] SINGLE LED" 27.152,33.31 r270 top (schematic designator L3)
L3_U0_4NP3 "[Neopixel] Single LED" "[NEOPIXEL] SINGLE LED" 27.279,18.716 r270 top (schematic designator L3)
L3_U1_4NP1 "[Neopixel] Single LED" "[NEOPIXEL] SINGLE LED" 3.504,47.879 r270 top (schematic designator L3)
L3_U1_4NP2 "[Neopixel] Single LED" "[NEOPIXEL] SINGLE LED" 3.657,33.31 r270 top (schematic designator L3)
L3_U1_4NP3 "[Neopixel] Single LED" "[NEOPIXEL] SINGLE LED" 3.657,18.716 r270 top (schematic designator L3)
L3_U1_4NP4 "[Neopixel] Single LED" "[NEOPIXEL] SINGLE LED" 15.442,4.136 r270 top (schematic designator L3)
L3_U2_4NP1 "[Neopixel] Single LED" "[NEOPIXEL] SINGLE LED" 21.108,55.082 r90 top (schematic designator L3)
L3_U2_4NP2 "[Neopixel] Single LED" "[NEOPIXEL] SINGLE LED" 21.108,40.593 r90 top (schematic designator L3)
L3_U2_4NP3 "[Neopixel] Single LED" "[NEOPIXEL] SINGLE LED" 21.235,25.999 r90 top (schematic designator L3)
L3_U2_4NP4 "[Neopixel] Single LED" "[NEOPIXEL] SINGLE LED" 9.499,11.394 r90 top (schematic designator L3)
L3_U3_4NP1 "[Neopixel] Single LED" "[NEOPIXEL] SINGLE LED" 44.73,55.082 r90 top (schematic designator L3)
L3_U3_4NP2 "[Neopixel] Single LED" "[Neopixel] Single LED" 45.085,4.064 r90 top (schematic designator L3)
L3_U3_4NP2 "[Neopixel] Single LED" "[NEOPIXEL] SINGLE LED" 44.73,40.593 r90 top (schematic designator L3)
L3_U3_4NP3 "[Neopixel] Single LED" "[NEOPIXEL] SINGLE LED" 44.73,25.999 r90 top (schematic designator L3)
L3_U3_4NP4 "[Neopixel] Single LED" "[NEOPIXEL] SINGLE LED" 33.046,11.394 r90 top (schematic designator L3)

## Footprints (in the part's own frame and the unit in brackets; to place one, negate y for a bottom-side part, rotate by r counter-clockwise, add the part's x,y. Pads: shape width x height; smd on the part's side, far side on the other; paste and mask are expansions set on the pad)
"[Cap] SMD 0805" [mm]
  rect 0.6x1.25 smd: 1(-0.9,0) 2(0.9,0)
  silkscreen extent 0,-0.53 0,0.53, body extent -1,-0.63 1,0.63, height 1
"[NEOPIXEL] SINGLE LED" [mm] "WS2812B"
  rrect20% 1.6x1.2 smd: 1(-2.25,1.55) 2(-2.25,-1.55) 3(2.25,-1.55) 4(2.25,1.55)
  silkscreen extent -3.4,-2.75 3.4,2.75, body extent -2.68,-2.47 2.68,2.47, height 1.7
"[Neopixel] Single LED" [mm] "WS2812B"
  rrect20% 1.6x1.2 smd: 1(-2.25,1.55) 2(-2.25,-1.55) 3(2.25,-1.55) 4(2.25,1.55)
  silkscreen extent -3.4,-2.75 3.4,2.75, body extent -2.68,-2.47 2.68,2.47, height 1.7
"[No Series] Shrouded 1x3" [mil] "1778777"
  rect 55x134 smd paste+0 mask+0: 1(-98.43,186.04) 2(0,186.04) 3(98.43,186.04)
  rect 91x220 smd paste-110 mask-110: 4(-202.76,-73.8) 5(202.76,-73.8)
  silkscreen extent -207,-225 207,300

## Part data
C1_U0_4NP1 C1_U0_4NP2 C1_U0_4NP3 C1_U1_4NP1 C1_U1_4NP2 C1_U1_4NP3 C1_U1_4NP4 C1_U2_4NP1 C1_U2_4NP2 C1_U2_4NP3 C1_U2_4NP4 C1_U3_4NP1 C1_U3_4NP2 C1_U3_4NP2 C1_U3_4NP3 C1_U3_4NP4 C2_U0_4NP1 C2_U0_4NP2 C2_U0_4NP3 C2_U1_4NP1 C2_U1_4NP2 C2_U1_4NP3 C2_U1_4NP4 C2_U2_4NP1 C2_U2_4NP2 C2_U2_4NP3 C2_U2_4NP4 C2_U3_4NP1 C2_U3_4NP2 C2_U3_4NP2 C2_U3_4NP3 C2_U3_4NP4 C3_U0_4NP1 C3_U0_4NP2 C3_U0_4NP3 C3_U1_4NP1 C3_U1_4NP2 C3_U1_4NP3 C3_U1_4NP4 C3_U2_4NP1 C3_U2_4NP2 C3_U2_4NP3 C3_U2_4NP4 C3_U3_4NP1 C3_U3_4NP2 C3_U3_4NP2 C3_U3_4NP3 C3_U3_4NP4 C4_U0_4NP1 C4_U0_4NP2 C4_U0_4NP3 C4_U1_4NP1 C4_U1_4NP2 C4_U1_4NP3 C4_U1_4NP4 C4_U2_4NP1 C4_U2_4NP2 C4_U2_4NP3 C4_U2_4NP4 C4_U3_4NP1 C4_U3_4NP2 C4_U3_4NP2 C4_U3_4NP3 C4_U3_4NP4: "CL21B104KBCNNNC", Capacitance=100nF, Max Voltage=50V, Size Package=0805, Supplier Part Number 1=1276-1003-6-ND, Tolerance=10%, Supplier 1=DigiKey
H0: library part "[No Series] Shrouded 1x3", "1778777", Supplier Part Number 1=277-2316-1-ND, Supplier 1=DigiKey
L0_U0_4NP1 L0_U0_4NP2 L0_U0_4NP3 L0_U1_4NP1 L0_U1_4NP2 L0_U1_4NP3 L0_U1_4NP4 L0_U2_4NP1 L0_U2_4NP2 L0_U2_4NP3 L0_U2_4NP4 L0_U3_4NP1 L0_U3_4NP2 L0_U3_4NP2 L0_U3_4NP3 L0_U3_4NP4 L1_U0_4NP1 L1_U0_4NP2 L1_U0_4NP3 L1_U1_4NP1 L1_U1_4NP2 L1_U1_4NP3 L1_U1_4NP4 L1_U2_4NP1 L1_U2_4NP2 L1_U2_4NP3 L1_U2_4NP4 L1_U3_4NP1 L1_U3_4NP2 L1_U3_4NP2 L1_U3_4NP3 L1_U3_4NP4 L2_U0_4NP1 L2_U0_4NP2 L2_U0_4NP3 L2_U1_4NP1 L2_U1_4NP2 L2_U1_4NP3 L2_U1_4NP4 L2_U2_4NP1 L2_U2_4NP2 L2_U2_4NP3 L2_U2_4NP4 L2_U3_4NP1 L2_U3_4NP2 L2_U3_4NP2 L2_U3_4NP3 L2_U3_4NP4 L3_U0_4NP1 L3_U0_4NP2 L3_U0_4NP3 L3_U1_4NP1 L3_U1_4NP2 L3_U1_4NP3 L3_U1_4NP4 L3_U2_4NP1 L3_U2_4NP2 L3_U2_4NP3 L3_U2_4NP4 L3_U3_4NP1 L3_U3_4NP2 L3_U3_4NP2 L3_U3_4NP3 L3_U3_4NP4: "WS2812B", Supplier Part Number 1=1568-16347CT-ND, Supplier 1=DigiKey

## Via types
v1: diameter 0.7, hole 0.3, Top Layer to Bottom Layer, 120 vias

## Text inside footprints (layer, text, board x,y; h text height)
H0: Mechanical 13 "RefDes2" at 39.882,10.027 h1.27 r90